# Altium PCB PCB1_00.PcbDoc
Units mil, origin at the board's own origin, x right, y up, seen from the top; angles counter-clockwise.
Board outline 5000 x 7020 mil, 2 copper layers (Top Layer, Bottom Layer); 37 components, 25 nets, 148 pads, 0 vias.
Unrouted connection lines stored in the file: 69.
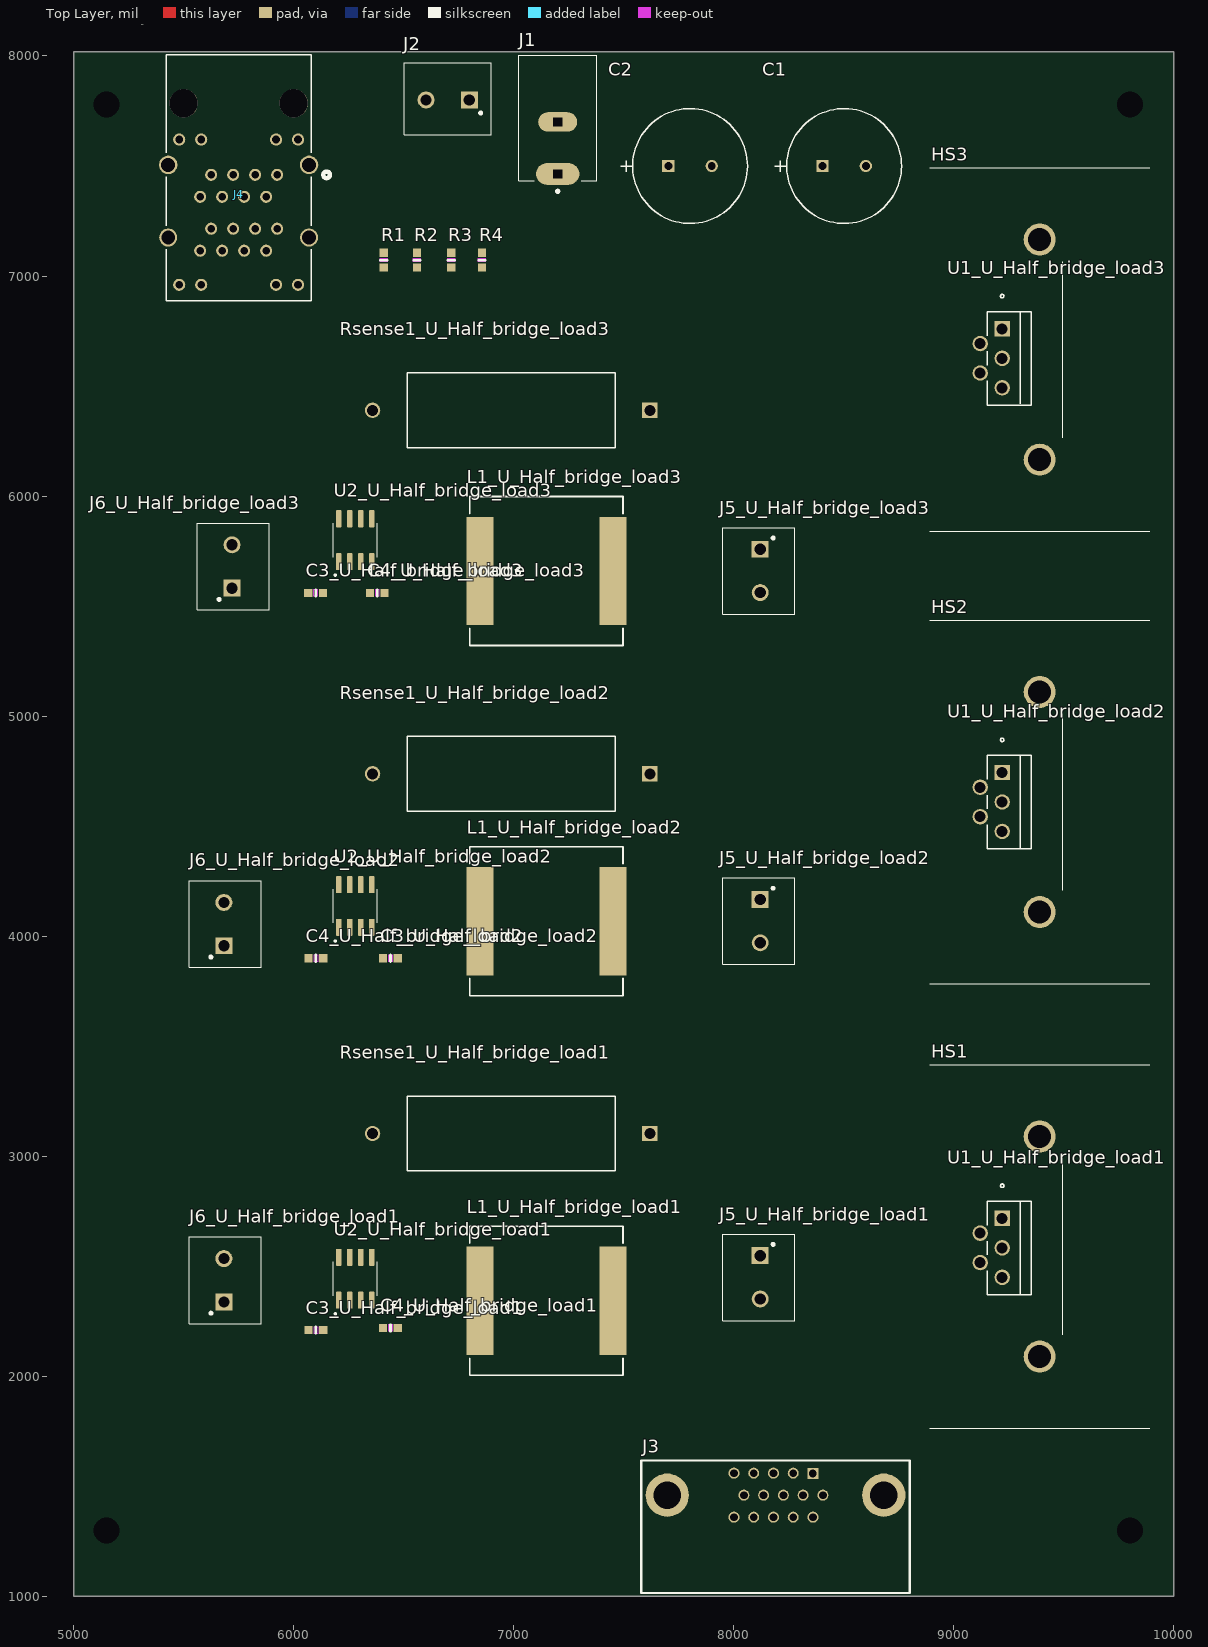
[diagram p0: Top Layer view]
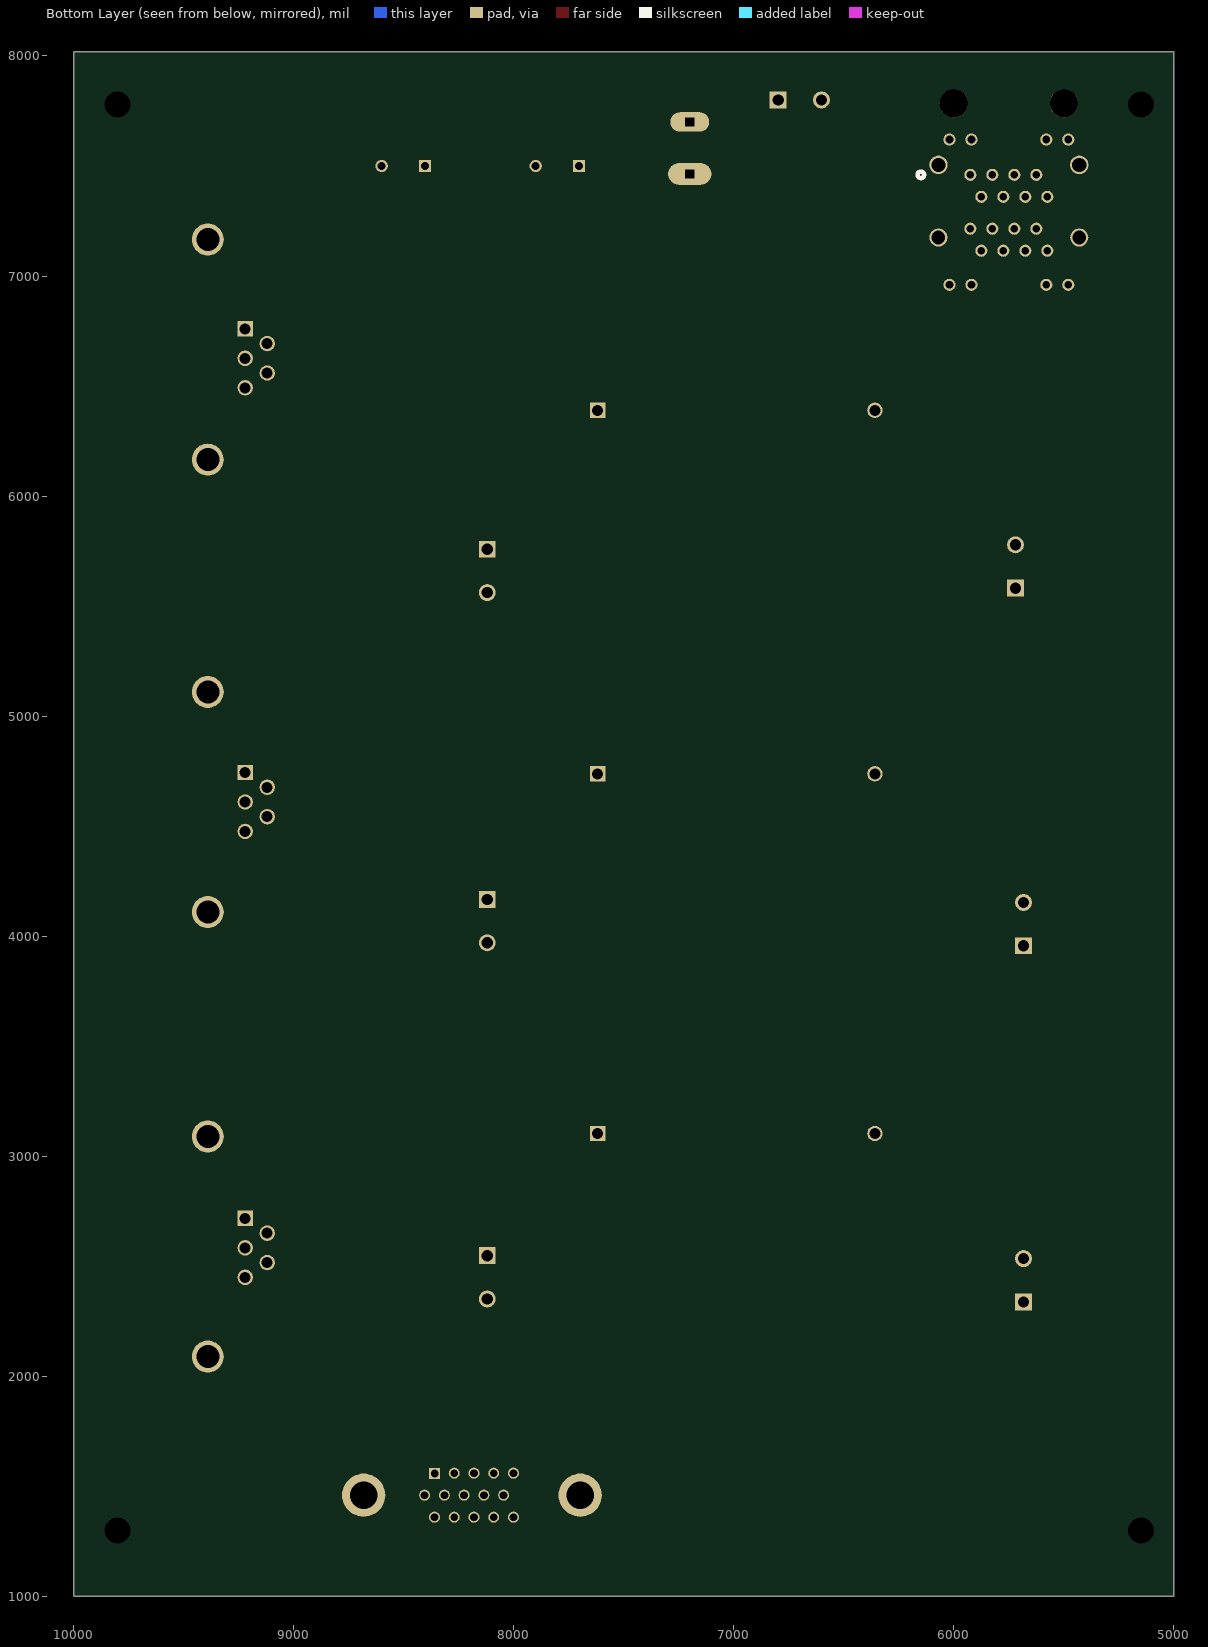
[diagram p1: Bottom Layer view, seen from below]

## Layer stack, top to bottom
Top Solder: solder mask 0.4, Solder Resist, Dk 3.5
Top Layer: signal copper 1.4
Dielectric 1: dielectric 12.6, FR-4, Dk 4.8
Bottom Layer: signal copper 1.4
Bottom Solder: solder mask 0.4, Solder Resist, Dk 3.5

## Board outline
5000,1000 10000,1000 10000,8020 5000,8020

## Design rules (kind name [scope] priority, off if disabled: settings)
BoardOutlineClearance [All] p1: gap=10 ignorepadtopadclearanceinfootprint=FALSE
Clearance [All] p1: gap=6 ignorepadtopadclearanceinfootprint=FALSE
HoleSize [All] p1: absolutevalues=TRUE maxlimit=250 minlimit=14 maxpercent=80.000 minpercent=20.000
MinimumSolderMaskSliver [All] p1: minsoldermaskwidth=6
PolygonConnect [All] p1: connectstyle=Relief reliefconductorwidth=10 reliefentries=4 polygonreliefangle="90 Angle" airgapwidth=10
RoutingVias [All] p1: holewidth=14 width=34 viastyle="Through Hole" minholewidth=14 minwidth=28 maxholewidth=30 maxwidth=60
SolderMaskExpansion [All] p1: expansion=4 istentingtop=FALSE
Width [All] p1: maxlimit=100 minlimit=6 preferedwidth=10
28 further rules are at their usual default settings.

## Classes and differential pairs
channel class Half_bridge_load: U_Half_bridge_load1 U_Half_bridge_load2 U_Half_bridge_load3
component class uInverter: C1 C2 HS1 HS2 HS3 J1 J2 J3 J4 R1 R2 R3 R4
component class U_Half_bridge_load3: C3_U_Half_bridge_load3 C4_U_Half_bridge_load3 J5_U_Half_bridge_load3 J6_U_Half_bridge_load3 L1_U_Half_bridge_load3 Rsense1_U_Half_bridge_load3 U1_U_Half_bridge_load3 U2_U_Half_bridge_load3
component class U_Half_bridge_load2: C3_U_Half_bridge_load2 C4_U_Half_bridge_load2 J5_U_Half_bridge_load2 J6_U_Half_bridge_load2 L1_U_Half_bridge_load2 Rsense1_U_Half_bridge_load2 U1_U_Half_bridge_load2 U2_U_Half_bridge_load2
component class U_Half_bridge_load1: C3_U_Half_bridge_load1 C4_U_Half_bridge_load1 J5_U_Half_bridge_load1 J6_U_Half_bridge_load1 L1_U_Half_bridge_load1 Rsense1_U_Half_bridge_load1 U1_U_Half_bridge_load1 U2_U_Half_bridge_load1

## Components (designator, comment, footprint, x,y, rotation, side; value= is the part's Value field where it differs from the comment)
C1 "1000u" CAP_PAN_12.5X25_PAN 8403,7500 r0 top
C2 "1000u" CAP_PAN_12.5X25_PAN 7703,7500 r0 top
C3_U_Half_bridge_load1 "2.2UF" 0603_CAP 6101.1,2210.39 r0 top (schematic designator C3)
C3_U_Half_bridge_load2 "2.2UF" 0603_CAP 6440,3900 r0 top (schematic designator C3)
C3_U_Half_bridge_load3 "2.2UF" 0603_CAP 6100,5560 r180 top (schematic designator C3)
C4_U_Half_bridge_load1 "2.2UF" 0603_CAP 6440,2220 r0 top (schematic designator C4)
C4_U_Half_bridge_load2 "2.2UF" 0603_CAP 6101.1,3900 r0 top (schematic designator C4)
C4_U_Half_bridge_load3 "2.2UF" 0603_CAP 6380,5560 r180 top (schematic designator C4)
HS1 "530002B02500G" 530002 9390,2590 r90 top
HS2 "530002B02500G" 530002 9390,4610 r90 top
HS3 "530002B02500G" 530002 9390,6666 r90 top
J1 "PJ-037AH" CUI_PJ-037AH 7200,7463.78 r90 top
J2 "1935161" PHOENIX_1935161 6700,7800 r180 top
J3 "ICD15S13E6GV00LF" ICD15S13E6GV00LF 8189.72,1460 r0 top
J4 "RJSAE-5385-02" CONN_RJSAE538502_AMP 5750,8005 r180 top
J5_U_Half_bridge_load1 "1935161" PHOENIX_1935161 8120,2450 r270 top (schematic designator J5)
J5_U_Half_bridge_load2 "1935161" PHOENIX_1935161 8120,4068.43 r270 top (schematic designator J5)
J5_U_Half_bridge_load3 "1935161" PHOENIX_1935161 8120,5660 r270 top (schematic designator J5)
J6_U_Half_bridge_load1 "1935161" PHOENIX_1935161 5683.13,2436.75 r90 top (schematic designator J6)
J6_U_Half_bridge_load2 "1935161" PHOENIX_1935161 5683.13,4055.17 r90 top (schematic designator J6)
J6_U_Half_bridge_load3 "1935161" PHOENIX_1935161 5720,5680 r90 top (schematic designator J6)
L1_U_Half_bridge_load1 "100u" FP-PA4344_104NLT-MFG 7148.66,2343.46 r270 top (schematic designator L1)
L1_U_Half_bridge_load2 "100u" FP-PA4344_104NLT-MFG 7148.66,4068.43 r270 top (schematic designator L1)
L1_U_Half_bridge_load3 "100u" FP-PA4344_104NLT-MFG 7148.66,5660 r270 top (schematic designator L1)
R1 "2.2K" 0603_RES 6410,7072.13 r270 top
R2 "2.2K" 0603_RES 6560,7072.13 r270 top
R3 "1.1K" 0603_RES 6715.75,7072.13 r90 top
R4 "1.1K" 0603_RES 6855.75,7072.13 r270 top
Rsense1_U_Half_bridge_load1 "150m" RES_15_OHM 7618.66,3103.46 r180 top (schematic designator Rsense1)
Rsense1_U_Half_bridge_load2 "150m" RES_15_OHM 7618.66,4738.19 r180 top (schematic designator Rsense1)
Rsense1_U_Half_bridge_load3 "150m" RES_15_OHM 7618.66,6390 r180 top (schematic designator Rsense1)
U1_U_Half_bridge_load1 "IXDN614CI" IXYS_TO-220-5_IXY 9220,2717.72 r270 top (schematic designator U1)
U1_U_Half_bridge_load2 "IXDN614CI" IXYS_TO-220-5_IXY 9220,4743.86 r270 top (schematic designator U1)
U1_U_Half_bridge_load3 "IXDN614CI" IXYS_TO-220-5_IXY 9220,6760 r270 top (schematic designator U1)
U2_U_Half_bridge_load1 "INA143U" SOIC127P599X175-8N 6280,2443.46 r90 top (schematic designator U2)
U2_U_Half_bridge_load2 "INA143U" SOIC127P599X175-8N 6280,4137.24 r90 top (schematic designator U2)
U2_U_Half_bridge_load3 "INA143U" SOIC127P599X175-8N 6280,5800 r90 top (schematic designator U2)

## Footprints (in the part's own frame and the unit in brackets; to place one, negate y for a bottom-side part, rotate by r counter-clockwise, add the part's x,y. Pads: shape width x height; smd on the part's side, far side on the other; paste and mask are expansions set on the pad)
0603_CAP [mm]
  rect 0.95x0.95 smd: 1(-0.85,0) 2(0.85,0)
  Top Layer keep-out region: -0.2,0.4 0.2,0.4 0.2,-0.4 -0.2,-0.4
  silkscreen extent 0,-0.38 0,0.38, body extent -0.8,-0.4 0.8,0.4, height 0.79
0603_RES [mm]
  rect 0.95x0.95 smd: 1(-0.85,0) 2(0.85,0)
  Top Layer keep-out region: -0.2,0.4 0.2,0.4 0.2,-0.4 -0.2,-0.4
  silkscreen extent 0,-0.38 0,0.38, body extent -0.8,-0.4 0.8,0.4, height 0.44
530002 [mil]
  round 145 hole 105: P$1(500,0) P$2(-500,0)
  silkscreen extent -825,-500 825,500, body extent -825,-500 825,500, height 1500
CAP_PAN_12.5X25_PAN [mil]
  rect 56x56 hole 36 mask+0: 1(0,0)
  round 56 hole 36 mask+0: 2(197,0)
  silkscreen extent -218,-261 360,261, body extent -158,-256 355,256, height 1064
CONN_RJSAE538502_AMP [mil]
  round 55 hole 35: 1A(-175,545) 1B(175,890) 2A(-125,645) 2B(125,790) 3A(-75,545) 3B(75,890) 4A(-25,645) 4B(25,790) 5A(25,545) 5B(-25,890) 6A(75,645) 6B(-75,790) 7A(125,545) 7B(-125,890) 8A(175,645) 8B(-175,790) 9(270,385) 10(170,385) 11(-170,385) 12(-270,385) 21(270,1045) 22(170,1045) 23(-170,1045) 24(-270,1045)
  round 84 hole 64: 25(-320,500) 26(320,500)
  round 82 hole 62: 27(-320,830) 28(320,830)
  round 128 hole 128 unplated: 29(-250,220) 30(250,220)
  silkscreen extent -415,0 330,1118, body extent -386,-19 388,1122, height 1067
CUI_PJ-037AH [mm]
  oval 2.5x5 hole 1 square: 1(0,0)
  oval 2.25x4.5 hole 1 square: 2(6,0)
  silkscreen extent -2.15,-4.5 13.7,4.5, body extent -0.77,-4.43 13.73,4.57, height 11.5
FP-PA4344_104NLT-MFG [mm]
  rect 12.5x3.15 smd paste+0 mask+0: 1(0,7.675) 2(0,-7.675)
  silkscreen extent -8.6,-8.85 8.6,8.85, body extent -8.83,-8.33 8.57,10.37, height 0.25
ICD15S13E6GV00LF [mm] "CONN DSUB HD RCPT 15POS R/A SLDR"
  rect 1.27x1.27 hole 0.9: 1(4.305,2.5)
  round 1.27 hole 0.9: 2(2.045,2.54) 3(-0.235,2.54) 4(-2.515,2.54) 5(-4.795,2.54) 6(5.465,0) 7(3.185,0) 8(0.905,0) 9(-1.375,0) 10(-3.655,0) 11(4.325,-2.54) 12(2.045,-2.54) 13(-0.235,-2.54) 14(-2.515,-2.54) 15(-4.795,-2.54)
  round 5 hole 3.2: SH1(12.495,0) SH2(-12.495,0)
  silkscreen extent -15.5,-11.3 15.5,4, body extent -15.45,-17.55 15.55,4.08, height 12.55
IXYS_TO-220-5_IXY [mil]
  rect 70x70 hole 50 mask+0: 1(0,0)
  round 70 hole 50 mask+0: 2(66.93,-100) 3(133.86,0) 4(200.79,-100) 5(267.72,0)
  silkscreen extent -157,-68 346,132, body extent -74,-120 341,127, height 837
PHOENIX_1935161 [mm]
  rect 1.95x1.95 hole 1.3: 1(-2.5,0)
  round 1.95 hole 1.3: 2(2.5,0)
  silkscreen extent -5,-4.3 5,4, body extent -5,-5 5.4,4, height 11.45
RES_15_OHM [mil]
  rect 70x70 hole 50 mask+0: 1(0,0)
  round 70 hole 50 mask+0: 2(1260,0)
  silkscreen extent 157,-170 1102,170, body extent -20,-165 1280,165, height 330
SOIC127P599X175-8N [mm]
  rrect25% 1.97x0.6 smd: 1(-2.47,1.905) 2(-2.47,0.635) 3(-2.47,-0.635) 4(-2.47,-1.905) 5(2.47,-1.905) 6(2.47,-0.635) 7(2.47,0.635) 8(2.47,1.905)
  silkscreen extent -4.14,-2.52 1.95,2.52, body extent -3,-2.45 3,2.45, height 1.75

## Part data
C1 C2: library part EEU-FM1V102B, "Cap Aluminum 1000uF 35V 20% (12.5 X 25mm) Radial 5mm 3190mA 7000 hr 105C Ammo Pack", Capacitance=1mF, Case/Package=Radial, ESR (Equivalent Series Resistance)=15mR, Manufacturer=Panasonic, Max Operating Temperature=105°C, Min Operating Temperature=-40°C, Package Quantity=500, Ripple Current=3.19A, Supplier Part Number 1=P19719CT-ND, Tolerance=20%, Voltage Rating=35V, Category="Aluminum Electrolytic Capacitors", ComponentLink1Description=https://datasheet.ciiva.com/11676/aba0000ce108-11676917.pdf?src-supplier=Avnet, ComponentLink1URL=https://datasheet.ciiva.com/11676/aba0000ce108-11676917.pdf?src-supplier=Avnet, Construction=RADIAL, Diameter=12mm, Height=25mm, Height - Seated (Max)=1.063inch, Impedance=15mR, Lead Diameter=0.6mm, Lead Free="Lead Free", Lead Pitch=5mm, Length=25mm, Life (Hours)=7000Hour, Manufacturer Part Number=EEU-FM1V102B, Mount="Through Hole", Packaging="Tape and Reel", Polarity=Polar, Pricing 1="1=1.11000, 10=0.84300, 50=0.70060, 100=0.60330 (USD)", Radiation Hardening=No, RoHS=Yes, RoHS Compliant=Yes, Series=FM, Stock 1=691, Supplier 1=Digi-Key, Termination=Radial, Voltage Rating (DC)=35V
C3_U_Half_bridge_load1 C3_U_Half_bridge_load2 C3_U_Half_bridge_load3 C4_U_Half_bridge_load1 C4_U_Half_bridge_load2 C4_U_Half_bridge_load3: library part GRM188R6YA225MA12D, "CAP CER 2.2UF 35V X5R 0603", Capacitance=2.2uF, Case Code (Imperial)=0603, Case Code (Metric)=1608, Dielectric=X5R, Manufacturer=Murata, Max Operating Temperature=85°C, Min Operating Temperature=-55°C, Package Quantity=4000, Supplier Part Number 1=490-10486-1-ND, Tolerance=20%, Voltage Rating=35V, Case/Package=0603, Category="Ceramic Capacitors", ComponentLink1Description=http://www.mouser.com/ds/2/281/c02e-2905.pdf?src-supplier=Mouser, ComponentLink1URL=http://www.mouser.com/ds/2/281/c02e-2905.pdf?src-supplier=Mouser, ComponentLink2Description=http://search.murata.co.jp/Ceramy/image/img/A01X/G101/ENG/GRM188R6YA225MA12-01.pdf?src-supplier=Digi-Key, ComponentLink2URL=http://search.murata.co.jp/Ceramy/image/img/A01X/G101/ENG/GRM188R6YA225MA12-01.pdf?src-supplier=Digi-Key, Height=0.8mm, Length=0.063inch, Manufacturer Part Number=GRM188R6YA225MA12D, Mount="Surface Mount", Packaging="Tape and Reel", Pricing 1="1=0.20000, 10=0.14000, 50=0.07960, 100=0.06600, 500=0.04630, 1000=0.03833 (USD)", RoHS=Yes, RoHS Compliant=Yes, Supplier 1=Digi-Key, Termination=SMD/SMT, Thickness=0.035inch, Voltage Rating (DC)=35V, Weight=0.000222oz, Width=0.031inch
HS1 HS2 HS3: "Heat Sink Passive TO-220 Radial Thru-Hole 2.6C/W Black Anodized", Case/Package=Radial, Color=Black, Manufacturer="Aavid Thermalloy", Natural Thermal Resistance=2.6°C/W, Package=None, Package Cooled=TO-220, Package Quantity=200, Supplier Part Number 1=HS380-ND, Thermal Resistance @ Forced Air Flow (100 LFM)=2°C/W, Availability=Unavailable, Category="Heat Sinks", ComponentLink1Description=https://datasheet.ciiva.com/15182/getdatasheetpartid-311919-15182633.pdf?src-supplier=Verical, ComponentLink1URL=https://datasheet.ciiva.com/15182/getdatasheetpartid-311919-15182633.pdf?src-supplier=Verical, ComponentLink2Description=https://datasheet.ciiva.com/22641/1699368-22641984.pdf?src-supplier=Element14, ComponentLink2URL=https://datasheet.ciiva.com/22641/1699368-22641984.pdf?src-supplier=Element14, ComponentLink3Description=https://datasheet.ciiva.com/19457/696626-19457620.pdf?src-supplier=Jameco, ComponentLink3URL=https://datasheet.ciiva.com/19457/696626-19457620.pdf?src-supplier=Jameco, ComponentLink4Description=https://datasheet.ciiva.com/6333/aavid-board-level-heatsinks-catalog-6333980.pdf?src-supplier=Digi-Key, ComponentLink4URL=https://datasheet.ciiva.com/6333/aavid-board-level-heatsinks-catalog-6333980.pdf?src-supplier=Digi-Key, ComponentLink5Description=https://datasheet.ciiva.com/14543/70115166-14543413.pdf?src-supplier=Allied+Electronics, ComponentLink5URL=https://datasheet.ciiva.com/14543/70115166-14543413.pdf?src-supplier=Allied+Electronics, Depth=25.4mm, Finish=Anodized, Height=63.5mm, Height Off Base=1inch, Lead Free="Lead Free", Length=41.91mm, Manufacturer Part Number=530002B02500G, Material=Aluminium,Anodized, MF="Aavid Thermalloy", Mount="Bolt,PC Pin,Solder", MP=530002B02500G, Price=None, Pricing 1="1=6.14000, 10=5.97200, 25=5.64040, 50=5.30860, 100=4.97680, 250=4.64500, 500=4.31320, 1000=4.23026 (USD)", Radiation Hardening=No, REACH SVHC=Unknown, RoHS=Yes, RoHS Compliant=Yes, Series=5300, Shape=Fins,Rectangular, SnapEDA_Link=https://www.snapeda.com/parts/530002B02500G/Aavid%20Thermalloy/view-part/4792019/?ref=snap, Stock 1=1035, Supplier 1=Digi-Key, Type=Passive, Width=1.65inch
J1: "CONN PWR JACK 2X5.5MM SOLDER", Color=Black, Current Rating=5A, Flammability Rating="UL94 V-0", Insulation Resistance=100MR, Manufacturer=CUI, Max Operating Temperature=85°C, Min Operating Temperature=-25°C, Package Quantity=500, Supplier Part Number 1=CP-037AH-ND, Voltage Rating=24V, Category=Connectors, ComponentLink1Description=http://www.mouser.com/ds/2/670/pj-037ah-516064.pdf?src-supplier=Mouser, ComponentLink1URL=http://www.mouser.com/ds/2/670/pj-037ah-516064.pdf?src-supplier=Mouser, ComponentLink2Description=https://www.cui.com/product/resource/digikeypdf/pj-037ah.pdf?src-supplier=Digi-Key, ComponentLink2URL=https://www.cui.com/product/resource/digikeypdf/pj-037ah.pdf?src-supplier=Digi-Key, Connector Type=Jack, Contact Gender=Male, Contact Material=Copper, Contact Plating=Nickel, Gender=Male, Housing Color=Black, Housing Material=Thermoplastic, Lead Free="Lead Free", Manufacturer Part Number=PJ-037AH, Mount="Through Hole", Number of Conductors=2, Orientation=Horizontal, Pricing 1="1=0.71000, 10=0.66600, 25=0.59920, 50=0.53280, 100=0.51060, 250=0.46620, 500=0.44400, 1000=0.36630, 2500=0.33300 (USD)", RoHS=Yes, RoHS Compliant=Yes, Series=-, Shielding=Unshielded, Stock 1=11304, Supplier 1=Digi-Key, Termination=Solder
J2 J5_U_Half_bridge_load1 J5_U_Half_bridge_load2 J5_U_Half_bridge_load3 J6_U_Half_bridge_load1 J6_U_Half_bridge_load2 J6_U_Half_bridge_load3: "Conn Terminal Blocks 2 POS 5mm Solder ST Thru-Hole 16A", Color=Green, Current=18A, Current Rating=17.5A, Flammability Rating="UL94 V-0", Manufacturer="Phoenix Contact", Max Current Rating=16A, Max Supply Voltage=250V, Package Quantity=250, Supplier Part Number 1=277-1667-ND, Voltage=300V, Voltage Rating (DC)=320V, Approvals=UL, Category="Terminal Blocks", ComponentLink1Description=https://datasheet.ciiva.com/15169/getdatasheetpartid-177903-15169663.pdf?src-supplier=Verical, ComponentLink1URL=https://datasheet.ciiva.com/15169/getdatasheetpartid-177903-15169663.pdf?src-supplier=Verical, ComponentLink2Description=https://datasheet.ciiva.com/16047/1935161-16047247.pdf?src-supplier=Onlinecomponents.com, ComponentLink2URL=https://datasheet.ciiva.com/16047/1935161-16047247.pdf?src-supplier=Onlinecomponents.com, ComponentLink3Description=https://datasheet.ciiva.com/824/combiconcompact5-0mmseries-824222.pdf?src-supplier=Digi-Key, ComponentLink3URL=https://datasheet.ciiva.com/824/combiconcompact5-0mmseries-824222.pdf?src-supplier=Digi-Key, Connector Type=Screw, Contact Material=Copper,Tin, Depth=9mm, Height=11.3mm, Housing Color=Green, Housing Material=Polyamide, Insulation Material=Nylon, Lead Free="Lead Free", Length=9mm, Manufacturer Part Number=1935161, Material=Nylon, Mount="Through Hole", Number of Circuits=2, Number of Contacts=2, Number of Levels=1, Number of Pins=2, Number of Poles=2, Number of Positions=2, Number of Positions Per Level=2, Number of Rows=1, Number of Ways=2, Orientation=Straight, Packaging=Bulk, Pitch=5mm, Pricing 1="1=0.43000, 10=0.41400, 50=0.39600, 100=0.38520, 250=0.36000, 500=0.33120, 1000=0.30600 (USD)", Radiation Hardening=No, REACH SVHC=Unknown, RoHS=Yes, RoHS Compliant=Yes, Series="COMBICON PT", Stock 1=82071, Supplier 1=Digi-Key, Termination=Solder, Voltage Rating=250V, Weight=0.067021oz, Width=14.9mm, Wire Gauge (Max)=26AWG, Wire Gauge (Min)=12AWG, Wire/Cable Gauge=26AWG
J3: "Conn High Density D-Sub SKT 15 POS 2.28mm Solder RA Thru-Hole 15 Terminal 1 Port", Case/Package=Metal, Color=Black, Current Rating=3A, Flammability Rating="UL94 V-0", Manufacturer="Amphenol FCI", Max Operating Temperature=125°C, Max Supply Voltage (AC)=300V, Min Operating Temperature=-55°C, Package Quantity=100, Supplier Part Number 1=609-2802-ND, Body Material=Metal,Steel, Category="D-Sub Connectors", ComponentLink1Description=https://datasheet.ciiva.com/22727/1728476-22727809.pdf?src-supplier=Element14, ComponentLink1URL=https://datasheet.ciiva.com/22727/1728476-22727809.pdf?src-supplier=Element14, ComponentLink2Description=https://datasheet.ciiva.com/652/c-cd-0011-652471.pdf?src-supplier=Digi-Key, ComponentLink2URL=https://datasheet.ciiva.com/652/c-cd-0011-652471.pdf?src-supplier=Digi-Key, ComponentLink3Description=https://datasheet.ciiva.com/8058/1728476-8058812.pdf?src-supplier=Element14, ComponentLink3URL=https://datasheet.ciiva.com/8058/1728476-8058812.pdf?src-supplier=Element14, Connector Type=D-Sub,Receptacle,Signal, Contact Material="Copper Alloy", Contact Plating=Gold,Tin,Matte, Depth=21.7mm, Gender=Female, Housing Color=Black, Housing Material=Steel, Lead Free="Lead Free", Length=30.81mm, Manufacturer Part Number=ICD15S13E6GV00LF, Mating Cycles=500, Max Voltage Rating (AC)=300V, Mount="Through Hole", Number of Contacts=15, Number of Ports=1, Number of Positions=15, Number of Rows=3, Number of Terminals/Pins=15, Orientation="Right Angle", Packaging=Bulk, Pitch=2.28mm, Plating=Bright,Tin,Steel,Chrome, Pricing 1="1=2.28000, 10=2.06800, 25=1.94120, 50=1.85680, 100=1.77230, 250=1.60352, 500=1.47692, 1000=1.26593, 2500=1.18154 (USD)", Radiation Hardening=No, REACH SVHC="No SVHC", RoHS=Yes, Stock 1=3485, Supplier 1=Digi-Key, Termination=Solder, Voltage Rating=300V, Width=12.58mm
J4: "CONN MOD JACK 8P8C R/A SHIELDED", Color=Black,Green, Current Rating=1.5A, Manufacturer="Amphenol Commercial", Max Operating Temperature=85°C, Min Operating Temperature=-55°C, Package Quantity=35, Supplier Part Number 1=RJSAE-5385-02-ND, Voltage Rating=125V, Category="Modular / Ethernet Connectors", ComponentLink1Description=https://datasheet.ciiva.com/26934/getdatasheetpartid-29521-26934348.pdf?src-supplier=Verical, ComponentLink1URL=https://datasheet.ciiva.com/26934/getdatasheetpartid-29521-26934348.pdf?src-supplier=Verical, Connector Type=Jack, Contact Material=Bronze, Contact Plating=Gold, Depth=28.15mm, Direction="Up and Down", Gender=Female, Housing Material=Thermoplastic, Lead Free="Lead Free", Length=16.51mm, Manufacturer Part Number=RJSAE-5385-02, Mount="Through Hole", Number of Contacts=16, Number of Ports=2, Number of Positions Loaded=16, Number of Rows=2, Orientation="Right Angle", Packaging=Tray, Pitch=2.54mm, Pricing 1="1=6.67000, 10=6.39000, 25=5.83440, 50=5.55660, 100=5.27880, 250=4.72312, 500=4.44528, 1000=4.01310 (USD)", Radiation Hardening=No, RoHS=Yes, RoHS Compliant=Yes, Series=RJSAE, Shielding=Shielded, Stock 1=254, Supplier 1=Digi-Key, Termination=Solder
L1_U_Half_bridge_load1 L1_U_Half_bridge_load2 L1_U_Half_bridge_load3: library part PA4344.104NLT, "FIXED IND 100UH 5.3A 118 MOHM", Case/Package=Nonstandard, Current Rating=5.3A, DC Resistance (DCR)=118mR, Inductance=100uH, Manufacturer=Pulse, Max Operating Temperature=125°C, Min Operating Temperature=-40°C, Ratings=AEC-Q200, Saturation Current=6.5A, Supplier Part Number 1=553-3011-1-ND, Test Frequency=100kHz, Category="Fixed Inductors", ComponentLink1Description=http://productfinder.pulseeng.com/products/datasheets/P771.pdf?src-supplier=Digi-Key, ComponentLink1URL=http://productfinder.pulseeng.com/products/datasheets/P771.pdf?src-supplier=Digi-Key, Height - Seated (Max)=0.276inch, Length=0.697inch, Manufacturer Part Number=PA4344.104NLT, Mount="Surface Mount", Packaging="Tape and Reel", Pricing 1="1=3.77000, 10=3.59600, 25=3.42480, 50=2.87700, 100=2.46600 (USD)", RoHS=Yes, RoHS Compliant=Yes, Shielding=Shielded, Stock 1=1739, Supplier 1=Digi-Key, Width=0.677inch
R1 R2: library part RCS06032K49FKEA, "Res Thick Film 0603 2.49K Ohm 1% 1/4W ±100ppm/°C Molded SMD Paper T/R", Case/Package=0603, Manufacturer="Vishay Dale", Max Operating Temperature=155°C, Max Power Dissipation=250mW, Min Operating Temperature=-55°C, Package Quantity=5000, Resistance=2.49kR, Resistor Type="Thick Film", Supplier Part Number 1=541-RCS06032K49FKEACT-ND, Temperature Coefficient=100ppm/°C, Tolerance=1%, Category="Chip SMD Resistors", ComponentLink1Description=http://www.vishay.com/docs/20065/rcse3.pdf?src-supplier=Digi-Key, ComponentLink1URL=http://www.vishay.com/docs/20065/rcse3.pdf?src-supplier=Digi-Key, Features="Automotive AEC-Q200", Height=0.02inch, Length=0.061inch, Manufacturer Part Number=RCS06032K49FKEA, Number of Terminations=2, Packaging="Tape and Reel", Pricing 1="1=0.14000, 10=0.12700, 100=0.04900, 1000=0.02154, 2500=0.01860 (USD)", RoHS=Yes, Supplier 1=Digi-Key, Width=0.033inch
R3 R4: library part RCS06031K10FKEA, "RES SMD 1.1K OHM 1% 1/4W 0603", Case/Package=0603, Manufacturer="Vishay Dale", Max Operating Temperature=155°C, Max Power Dissipation=250mW, Min Operating Temperature=-55°C, Package Quantity=5000, Resistance=1.1kR, Resistor Type="Thick Film", Supplier Part Number 1=541-RCS06031K10FKEACT-ND, Temperature Coefficient=100ppm/°C, Tolerance=1%, Category="Chip SMD Resistors", ComponentLink1Description=http://www.vishay.com/docs/20065/rcse3.pdf?src-supplier=Digi-Key, ComponentLink1URL=http://www.vishay.com/docs/20065/rcse3.pdf?src-supplier=Digi-Key, Features="Automotive AEC-Q200", Height=0.02inch, Length=0.061inch, Manufacturer Part Number=RCS06031K10FKEA, Number of Terminations=2, Packaging="Tape and Reel", Pricing 1="1=0.14000, 10=0.12700, 100=0.04900, 1000=0.02154, 2500=0.01860 (USD)", RoHS=Yes, Stock 1=4990, Supplier 1=Digi-Key, Width=0.033inch
Rsense1_U_Half_bridge_load1 Rsense1_U_Half_bridge_load2 Rsense1_U_Half_bridge_load3: library part 15FR150E, "Resistor; Wirewound; Res 0.15 Ohms; Pwr-Rtg 5 W; Tol 1%; Axial; Silicone; Cur-Sense", Case/Package=Axial, Manufacturer=Ohmite, Max Operating Temperature=275°C, Max Power Dissipation=5W, Min Operating Temperature=-55°C, Package Quantity=10, Resistance=150mR, Resistance Tolerance=1%, Resistor Type=Wirewound, Supplier Part Number 1=15FR150E-ND, Temperature Coefficient=50ppm/°C, Voltage Rating=100mV, Voltage Rating (DC)=1kV, Body Diameter=8.4mm, Body Length=23.8mm, Category="Through-Hole Resistors", ComponentLink1Description=https://datasheet.ciiva.com/2716/res-10-2716526.pdf?src-supplier=Digi-Key, ComponentLink1URL=https://datasheet.ciiva.com/2716/res-10-2716526.pdf?src-supplier=Digi-Key, ComponentLink2Description=https://datasheet.ciiva.com/16771/70022566-16771081.pdf?src-supplier=Allied+Electronics, ComponentLink2URL=https://datasheet.ciiva.com/16771/70022566-16771081.pdf?src-supplier=Allied+Electronics, ComponentLink3Description=https://datasheet.ciiva.com/1131/66208-1131710.pdf?src-supplier=Element14, ComponentLink3URL=https://datasheet.ciiva.com/1131/66208-1131710.pdf?src-supplier=Element14, Diameter=8.4mm, Lead Diameter=0.05mm, Lead Free="Lead Free", Lead Length=39.7mm, Length=23.8mm, Manufacturer Part Number=15FR150E, Mount="Through Hole", Number of Pins=2, Number of Terminations=2, Packaging=Bulk, Power Rating=5W, Pricing 1="1=3.11000, 10=2.77800, 25=2.61080, 50=2.38860, 100=2.05540, 250=1.77760, 500=1.61096, 1000=1.41652, 5000=1.36653 (USD)", RoHS=Yes, Series=10, Stock 1=1147, Supplier 1=Digi-Key, Termination=Axial, Tolerance=1%
U1_U_Half_bridge_load1 U1_U_Half_bridge_load2 U1_U_Half_bridge_load3: "14-Ampere Low-Side Ultrafast MOSFET Driver 5-Lead TO-220", Case/Package=TO-220-5, Manufacturer=IXYS, Max Operating Temperature=125°C, Max Output Current=14A, Max Supply Voltage=35V, Min Operating Temperature=-40°C, Min Supply Voltage=4.5V, Package Quantity=50, Supplier Part Number 1=IXDN614CI-ND, Category="Gate Drivers", ComponentLink1Description=https://datasheet.ciiva.com/6611/ixd-614-6611632.pdf?src-supplier=Digi-Key, ComponentLink1URL=https://datasheet.ciiva.com/6611/ixd-614-6611632.pdf?src-supplier=Digi-Key, ComponentLink2Description=https://datasheet.ciiva.com/16352/ixd-614-r00h-16352558.pdf?src-supplier=Future+Electronics, ComponentLink2URL=https://datasheet.ciiva.com/16352/ixd-614-r00h-16352558.pdf?src-supplier=Future+Electronics, Fall Time=25ns, Lead Free="Lead Free", Manufacturer Part Number=IXDN614CI, Mount="Through Hole", Number of Drivers=1, Number of Outputs=1, Number of Pins=5, Output Impedance=1.5R, Packaging=Rail/Tube, Pricing 1="1=5.45000, 10=4.89400, 25=4.62640, 100=4.00960, 250=3.80396, 500=3.41328, 1000=2.90970 (USD)", Propagation Delay=70ns, Rise Time=35ns, RoHS=Yes, RoHS Compliant=Yes, Series=-, Stock 1=879, Supplier 1=Digi-Key
U2_U_Half_bridge_load1 U2_U_Half_bridge_load2 U2_U_Half_bridge_load3: "SP Amp Difference Amplifier Single ±18V/36V 8-Pin SOIC Tube", Case/Package=D, Dual Supply Voltage=15V, Input Offset Voltage (Vos)=100uV, Input Resistance=55kR, Manufacturer="Texas Instruments", Max Dual Supply Voltage=18V, Max Input Voltage=36V, Max Operating Temperature=85°C, Min Dual Supply Voltage=2.25V, Min Operating Temperature=-40°C, Min Supply Voltage=4.5V, Nominal Supply Current=950uA, Output Current per Channel=32mA, Package Quantity=75, Supplier Part Number 1=INA143U-ND, Voltage Gain=20dB, -3db Bandwidth=150kHz, Bandwidth=150kHz, Category="Amplifiers - Op Amps, Buffer, Instrumentation", Common Mode Rejection Ratio=86dB, ComponentLink1Description=https://datasheet.ciiva.com/19474/1341122-19474592.pdf?src-supplier=Jameco, ComponentLink1URL=https://datasheet.ciiva.com/19474/1341122-19474592.pdf?src-supplier=Jameco, ComponentLink2Description=https://datasheet.ciiva.com/15128/getdatasheetpartid-49975-15128159.pdf?src-supplier=Verical, ComponentLink2URL=https://datasheet.ciiva.com/15128/getdatasheetpartid-49975-15128159.pdf?src-supplier=Verical, ComponentLink3Description=https://datasheet.ciiva.com/1799/ina143-1799971.pdf?src-supplier=Digi-Key, ComponentLink3URL=https://datasheet.ciiva.com/1799/ina143-1799971.pdf?src-supplier=Digi-Key, ComponentLink4Description=https://datasheet.ciiva.com/2976/ina2143-2976117.pdf?src-supplier=Avnet, ComponentLink4URL=https://datasheet.ciiva.com/2976/ina2143-2976117.pdf?src-supplier=Avnet, ComponentLink5Description=https://datasheet.ciiva.com/26191/sbos116-26191078.pdf?src-supplier=Avnet+Europe, ComponentLink5URL=https://datasheet.ciiva.com/26191/sbos116-26191078.pdf?src-supplier=Avnet+Europe, ComponentLink6Description=https://datasheet.ciiva.com/1485/693952-1485228.pdf?src-supplier=Element14, ComponentLink6URL=https://datasheet.ciiva.com/1485/693952-1485228.pdf?src-supplier=Element14, ComponentLink7Description=https://datasheet.ciiva.com/48707/001010602-da-01-en-ic-opamp-diff-150khz-ina143u-soic-8-tid-48707338.pdf?src-supplier=Conrad, ComponentLink7URL=https://datasheet.ciiva.com/48707/001010602-da-01-en-ic-opamp-diff-150khz-ina143u-soic-8-tid-48707338.pdf?src-supplier=Conrad, Gain Bandwidth Product=150kHz, Height=1.58mm, Lead Free="Lead Free", Length=4.9mm, Manufacturer Part Number=INA143U, Max Supply Voltage=36V, Min Input Voltage=2.25V, Number of Amplifiers=1, Number of Channels=1, Number of Circuits=1, Number of Elements=1, Number of Pins=8, Operating Supply Current=950uA, Packaging=Rail/Tube, Pricing 1="1=4.01000, 10=3.60000, 25=3.40320, 100=2.79830, 250=2.51096, 500=2.42020, 1000=2.01178, 2500=1.99780 (USD)", Quiescent Current=950uA, Radiation Hardening=No, REACH SVHC="No SVHC", RoHS=Yes, Settling Time=6us, Slew Rate=5V/µs, Stock 1=417, Supplier 1=Digi-Key, Weight=0.002677oz, Width=3.91mm

## Free pads (board coordinates)
  round 60 hole 118.11 unplated: 1(5150,1300) 1(5150,7780) 1(9800,1300) 1(9800,7780)

## Nets (pads, with @x,y where several pads share a name; then routed paths per layer and width w, separated by ;. In a path a pad name is that pad's centre, name@x,y a point inside that pad or via, vN(x,y) a via of type N, cw(c..) or ccw(c..) an arc to the next point about the centre after c; other vN are vias at no path point)
GND: C1.2 C2.2 C3_U_Half_bridge_load1.2 C3_U_Half_bridge_load2.2 C3_U_Half_bridge_load3.2 C4_U_Half_bridge_load1.2 C4_U_Half_bridge_load2.2 C4_U_Half_bridge_load3.2 J1.2 J2.1 J4.2A J4.2B J4.4A J4.4B J4.6A J4.6B J4.8A J4.8B R4.2 U1_U_Half_bridge_load1.3 U1_U_Half_bridge_load2.3 U1_U_Half_bridge_load3.3 U2_U_Half_bridge_load1.1 U2_U_Half_bridge_load2.1 U2_U_Half_bridge_load3.1
ISENSE_A: J4.1A U2_U_Half_bridge_load3.5 U2_U_Half_bridge_load3.6
ISENSE_B: J4.7A U2_U_Half_bridge_load2.5 U2_U_Half_bridge_load2.6
ISENSE_C: J4.1B U2_U_Half_bridge_load1.5 U2_U_Half_bridge_load1.6
NetJ5_U_Half_bridge_load1_1: J5_U_Half_bridge_load1.1 U1_U_Half_bridge_load1.2
NetJ5_U_Half_bridge_load1_2: J5_U_Half_bridge_load1.2 L1_U_Half_bridge_load1.1
NetJ5_U_Half_bridge_load2_1: J5_U_Half_bridge_load2.1 U1_U_Half_bridge_load2.2
NetJ5_U_Half_bridge_load2_2: J5_U_Half_bridge_load2.2 L1_U_Half_bridge_load2.1
NetJ5_U_Half_bridge_load3_1: J5_U_Half_bridge_load3.1 U1_U_Half_bridge_load3.2
NetJ5_U_Half_bridge_load3_2: J5_U_Half_bridge_load3.2 L1_U_Half_bridge_load3.1
NetJ6_U_Half_bridge_load1_1: J6_U_Half_bridge_load1.1 Rsense1_U_Half_bridge_load1.2 U2_U_Half_bridge_load1.3
NetJ6_U_Half_bridge_load1_2: J6_U_Half_bridge_load1.2 J6_U_Half_bridge_load2.2 J6_U_Half_bridge_load3.2
NetJ6_U_Half_bridge_load2_1: J6_U_Half_bridge_load2.1 Rsense1_U_Half_bridge_load2.2 U2_U_Half_bridge_load2.3
NetJ6_U_Half_bridge_load3_1: J6_U_Half_bridge_load3.1 Rsense1_U_Half_bridge_load3.2 U2_U_Half_bridge_load3.3
NetL1_U_Half_bridge_load1_2: L1_U_Half_bridge_load1.2 Rsense1_U_Half_bridge_load1.1 U2_U_Half_bridge_load1.2
NetL1_U_Half_bridge_load2_2: L1_U_Half_bridge_load2.2 Rsense1_U_Half_bridge_load2.1 U2_U_Half_bridge_load2.2
NetL1_U_Half_bridge_load3_2: L1_U_Half_bridge_load3.2 Rsense1_U_Half_bridge_load3.1 U2_U_Half_bridge_load3.2
NetR3_2: R3.2 R4.1
PWM_A: J3.1 U1_U_Half_bridge_load3.4
PWM_B: J3.3 U1_U_Half_bridge_load2.4
PWM_C: J3.5 U1_U_Half_bridge_load1.4
VCC+: J4.3A U2_U_Half_bridge_load1.7 U2_U_Half_bridge_load2.7 U2_U_Half_bridge_load3.7
VCC-: J4.5A U2_U_Half_bridge_load1.4 U2_U_Half_bridge_load2.4 U2_U_Half_bridge_load3.4
VDC(12V): C1.1 C2.1 J1.1 J2.2 R1.1 U1_U_Half_bridge_load1.1 U1_U_Half_bridge_load2.1 U1_U_Half_bridge_load3.1
VDC_SENSE: J4.7B R2.2 R3.1
pads on no net: C3_U_Half_bridge_load1.1 C3_U_Half_bridge_load2.1 C3_U_Half_bridge_load3.1 C4_U_Half_bridge_load1.1 C4_U_Half_bridge_load2.1 C4_U_Half_bridge_load3.1 HS1.P$1 HS1.P$2 HS2.P$1 HS2.P$2 HS3.P$1 HS3.P$2 J3.2 J3.4 J3.6 J3.7 J3.8 J3.9 J3.10 J3.11 J3.12 J3.13 J3.14 J3.15 J3.SH1 J3.SH2 J4.3B J4.5B J4.9 J4.10 J4.11 J4.12 J4.21 J4.22 J4.23 J4.24 J4.25 J4.26 J4.27 J4.28 J4.29 J4.30 R1.2 R2.1 U1_U_Half_bridge_load1.5 U1_U_Half_bridge_load2.5 U1_U_Half_bridge_load3.5 U2_U_Half_bridge_load1.8 U2_U_Half_bridge_load2.8 U2_U_Half_bridge_load3.8

## Text inside footprints (layer, text, board x,y; h text height)
U1_U_Half_bridge_load1: Mechanical 13 "TAB" at 9309.5,2602.61 h25 r270
U1_U_Half_bridge_load2: Mechanical 13 "TAB" at 9309.5,4628.75 h25 r270
U1_U_Half_bridge_load3: Mechanical 13 "TAB" at 9309.5,6644.89 h25 r270